# Altium PCB PCB1.PcbDoc (part 2 of 2)
Units mil, origin at the board's own origin, x right, y up, seen from the top; angles counter-clockwise.
Board outline 8460 x 6430 mil, 2 copper layers (Top Layer, Bottom Layer); 197 components, 213 nets, 804 pads, 61 vias.
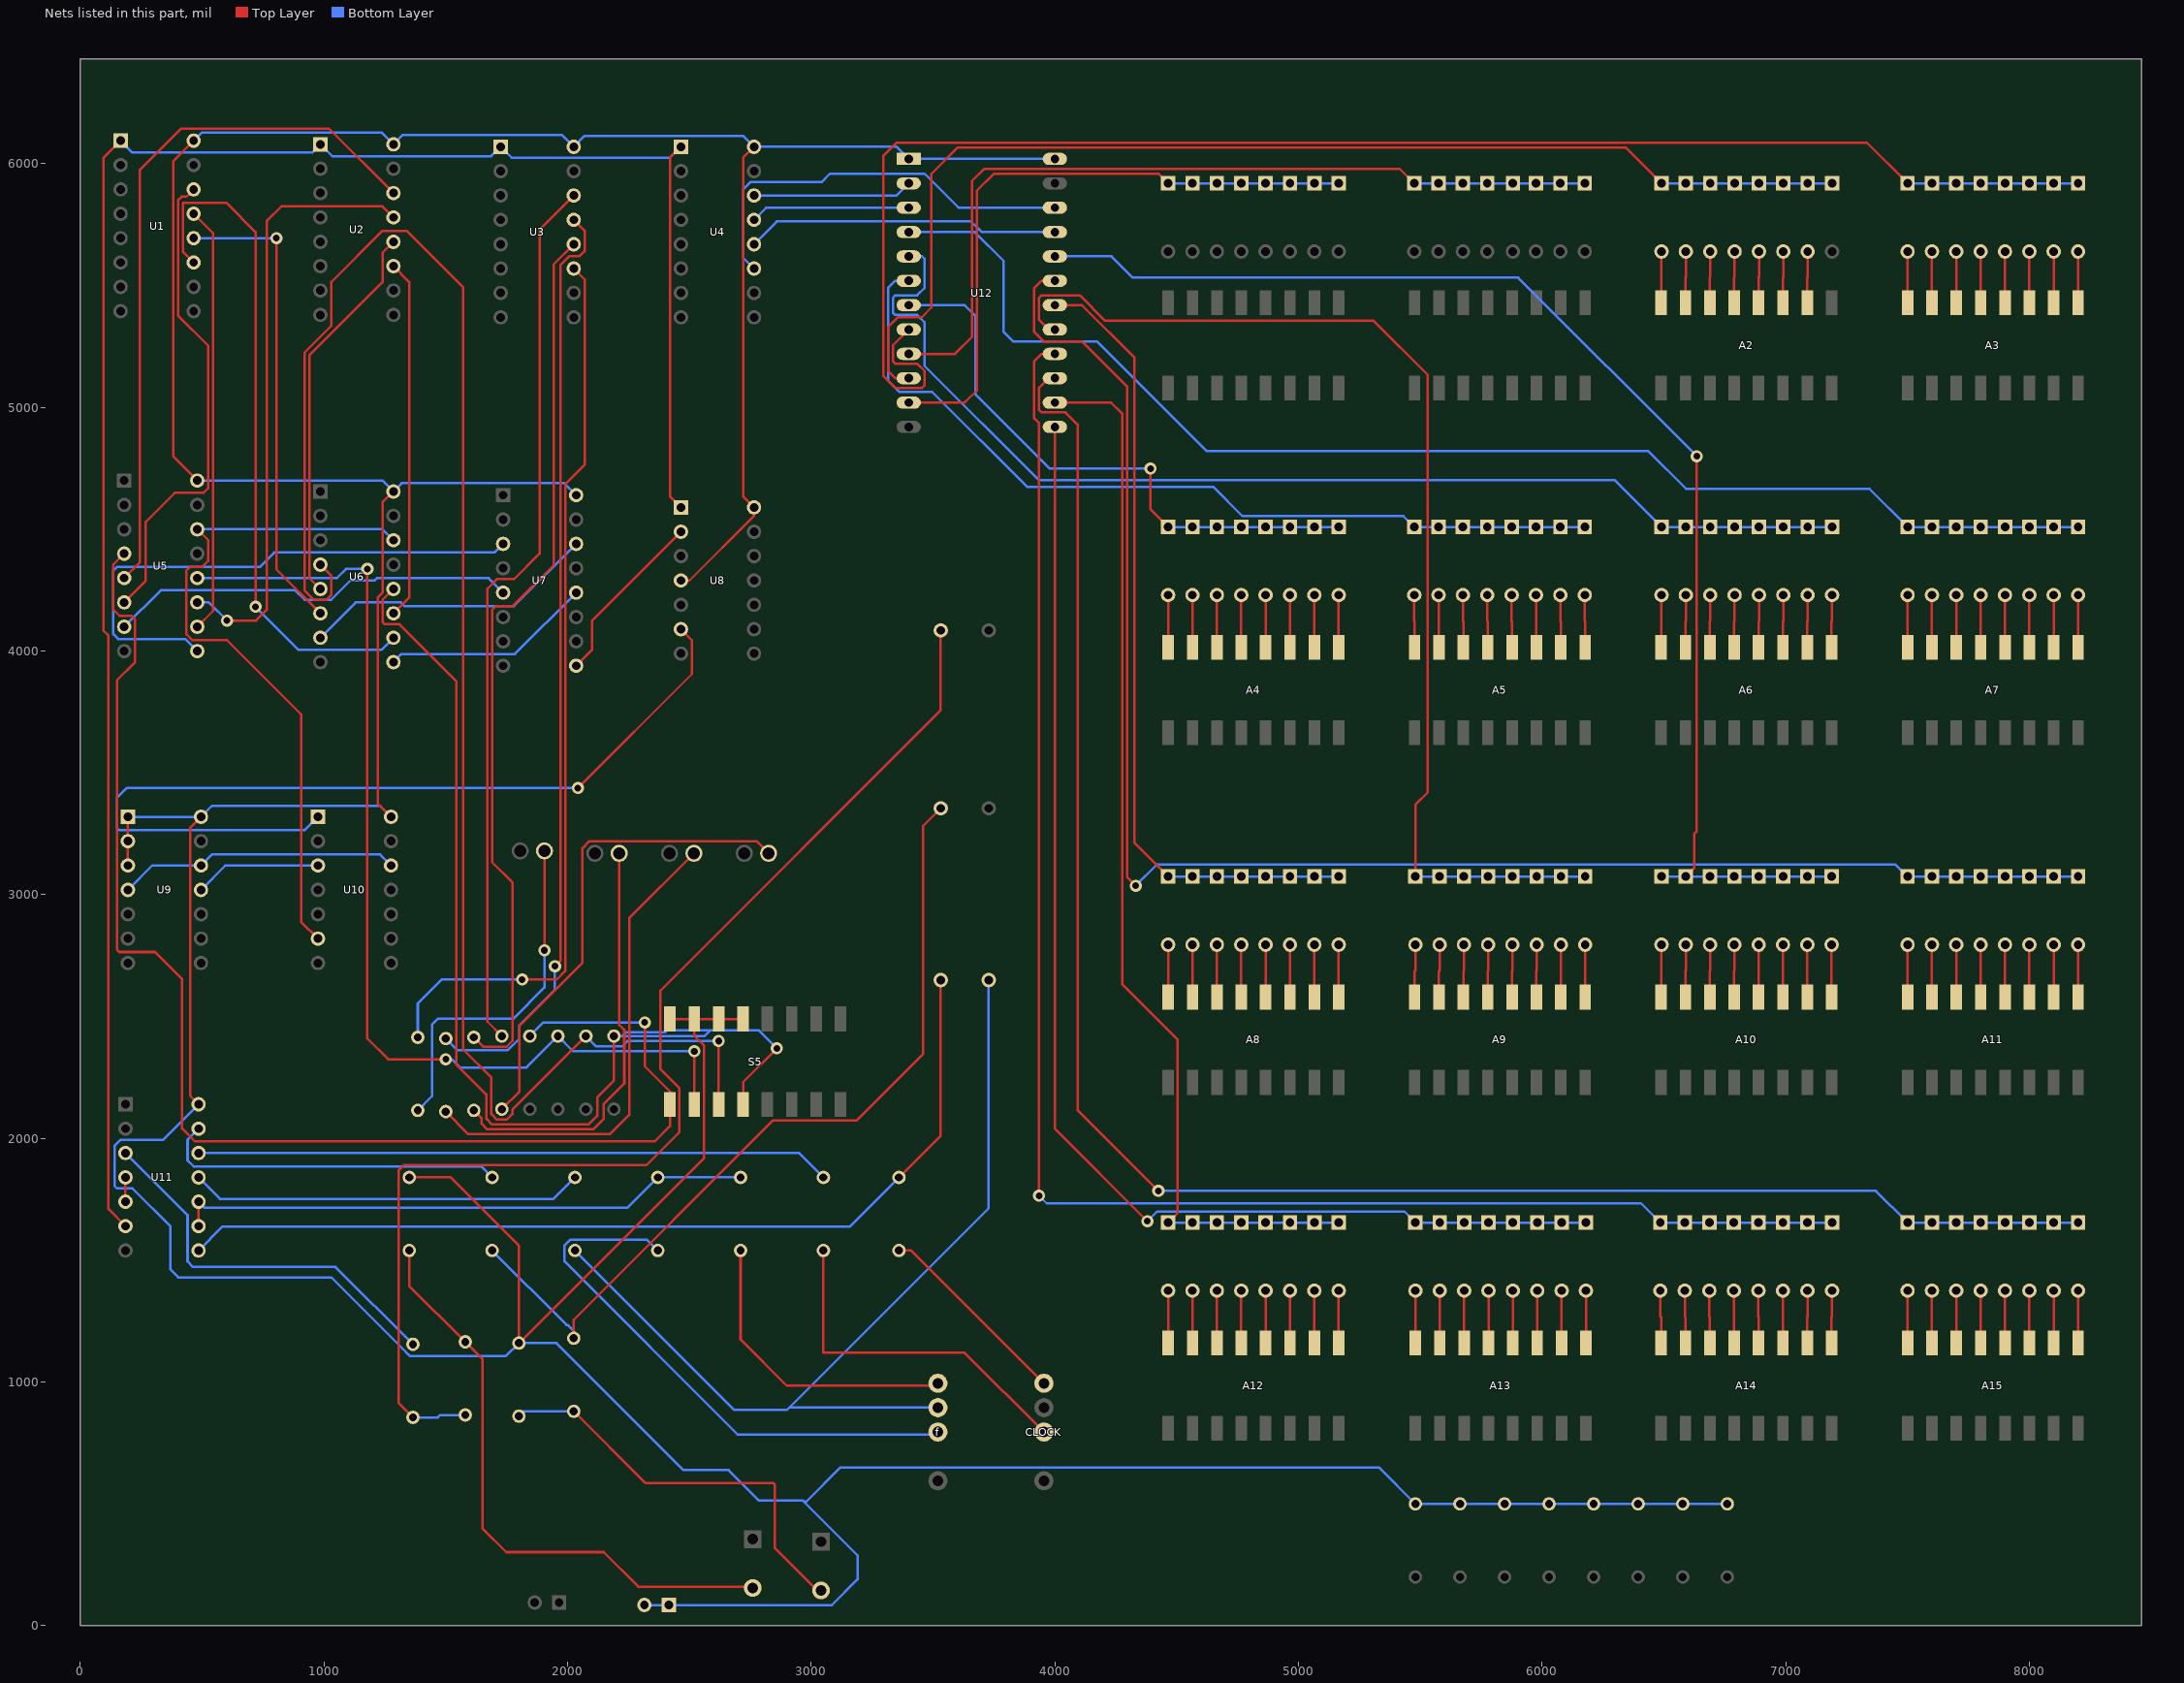
[diagram p2: the nets of this part, all layers, seen from the top]

## Via types
v1: diameter 50, hole 28, Top Layer to Bottom Layer, 61 vias

## Nets (pads, with @x,y where several pads share a name; then routed paths per layer and width w, separated by ;. In a path a pad name is that pad's centre, name@x,y a point inside that pad or via, vN(x,y) a via of type N, cw(c..) or ccw(c..) an arc to the next point about the centre after c; other vN are vias at no path point) (continued)
NetA2_10: A2.10 D18.1 | length 210.7
  Top Layer w10: A2.10@7088.33,5430.2 7088.33,5534 7090,5535.67 D18.1@7090,5640.24
NetA2_11: A2.11 D19.1 | length 210.7
  Top Layer w10: A2.11@6988.33,5430.2 6988.33,5534 6990,5535.67 D19.1@6990,5640.24
NetA2_12: A2.12 D20.1 | length 210.7
  Top Layer w10: A2.12@6888.33,5430.2 6888.33,5534 6890,5535.67 D20.1@6890,5640.24
NetA2_13: A2.13 D21.1 | length 210.7
  Top Layer w10: A2.13@6788.33,5430.2 6788.33,5534 6790,5535.67 D21.1@6790,5640.24
NetA2_14: A2.14 D22.1 | length 210.7
  Top Layer w10: A2.14@6688.33,5430.2 6688.33,5534 6690,5535.67 D22.1@6690,5640.24
NetA2_15: A2.15 D23.1 | length 210.7
  Top Layer w10: A2.15@6588.33,5430.2 6588.33,5534 6590,5535.67 D23.1@6590,5640.24
NetA2_16: A2.16 D24.1 | length 210.7
  Top Layer w10: A2.16@6488.33,5430.2 6488.33,5534 6490,5535.67 D24.1@6490,5640.24
NetA3_9: A3.9 D25.1 | length 210
  Top Layer w10: A3.9@8200,5430.2 D25.1@8200,5640.24
NetA3_10: A3.10 D26.1 | length 210
  Top Layer w10: A3.10@8100,5430.2 D26.1@8100,5640.24
NetA3_11: A3.11 D27.1 | length 210
  Top Layer w10: A3.11@8000,5430.2 D27.1@8000,5640.24
NetA3_12: A3.12 D28.1 | length 210
  Top Layer w10: A3.12@7900,5430.2 D28.1@7900,5640.24
NetA3_13: A3.13 D29.1 | length 210
  Top Layer w10: A3.13@7800,5430.2 D29.1@7800,5640.24
NetA3_14: A3.14 D30.1 | length 210
  Top Layer w10: A3.14@7700,5430.2 D30.1@7700,5640.24
NetA3_15: A3.15 D31.1 | length 210
  Top Layer w10: A3.15@7600,5430.2 D31.1@7600,5640.24
NetA3_16: A3.16 D32.1 | length 210
  Top Layer w10: A3.16@7500,5430.2 D32.1@7500,5640.24
NetA4_9: A4.9 D33.1 | length 214.8
  Top Layer w10: A4.9@5165,4015.39 D33.1@5165,4230.24
NetA4_10: A4.10 D34.1 | length 214.8
  Top Layer w10: A4.10@5065,4015.39 D34.1@5065,4230.24
NetA4_11: A4.11 D35.1 | length 214.8
  Top Layer w10: A4.11@4965,4015.39 D35.1@4965,4230.24
NetA4_12: A4.12 D36.1 | length 214.8
  Top Layer w10: A4.12@4865,4015.39 D36.1@4865,4230.24
NetA4_13: A4.13 D37.1 | length 214.8
  Top Layer w10: A4.13@4765,4015.39 D37.1@4765,4230.24
NetA4_14: A4.14 D38.1 | length 214.8
  Top Layer w10: A4.14@4665,4015.39 D38.1@4665,4230.24
NetA4_15: A4.15 D39.1 | length 214.8
  Top Layer w10: A4.15@4565,4015.39 D39.1@4565,4230.24
NetA4_16: A4.16 D40.1 | length 214.8
  Top Layer w10: A4.16@4465,4015.39 D40.1@4465,4230.24
NetA5_9: A5.9 D41.1 | length 215.7
  Top Layer w10: D41.1@6175,4230.24 6175,4122.67 6176.67,4121 A5.9@6176.67,4015.2
NetA5_10: A5.10 D42.1 | length 215.7
  Top Layer w10: D42.1@6075,4230.24 6075,4122.67 6076.67,4121 A5.10@6076.67,4015.2
NetA5_11: A5.11 D43.1 | length 215.7
  Top Layer w10: D43.1@5975,4230.24 5975,4122.67 5976.67,4121 A5.11@5976.67,4015.2
NetA5_12: A5.12 D44.1 | length 215.7
  Top Layer w10: D44.1@5875,4230.24 5875,4122.67 5876.67,4121 A5.12@5876.67,4015.2
NetA5_13: A5.13 D45.1 | length 215.7
  Top Layer w10: D45.1@5775,4230.24 5775,4122.67 5776.67,4121 A5.13@5776.67,4015.2
NetA5_14: A5.14 D46.1 | length 215.7
  Top Layer w10: D46.1@5675,4230.24 5675,4122.67 5676.67,4121 A5.14@5676.67,4015.2
NetA5_15: A5.15 D47.1 | length 215.7
  Top Layer w10: D47.1@5575,4230.24 5575,4122.67 5576.67,4121 A5.15@5576.67,4015.2
NetA5_16: A5.16 D48.1 | length 215.7
  Top Layer w10: D48.1@5475,4230.24 5475,4122.67 5476.67,4121 A5.16@5476.67,4015.2
NetA6_9: A6.9 D49.1 | length 215.7
  Top Layer w10: A6.9@7188.33,4015.2 7188.33,4121 7190,4122.67 D49.1@7190,4230.24
NetA6_10: A6.10 D50.1 | length 215.7
  Top Layer w10: A6.10@7088.33,4015.2 7088.33,4121 7090,4122.67 D50.1@7090,4230.24
NetA6_11: A6.11 D51.1 | length 215.7
  Top Layer w10: A6.11@6988.33,4015.2 6988.33,4121 6990,4122.67 D51.1@6990,4230.24
NetA6_12: A6.12 D52.1 | length 215.7
  Top Layer w10: A6.12@6888.33,4015.2 6888.33,4121 6890,4122.67 D52.1@6890,4230.24
NetA6_13: A6.13 D53.1 | length 215.7
  Top Layer w10: A6.13@6788.33,4015.2 6788.33,4121 6790,4122.67 D53.1@6790,4230.24
NetA6_14: A6.14 D54.1 | length 215.7
  Top Layer w10: A6.14@6688.33,4015.2 6688.33,4121 6690,4122.67 D54.1@6690,4230.24
NetA6_15: A6.15 D55.1 | length 215.7
  Top Layer w10: A6.15@6588.33,4015.2 6588.33,4121 6590,4122.67 D55.1@6590,4230.24
NetA6_16: A6.16 D56.1 | length 215.7
  Top Layer w10: A6.16@6488.33,4015.2 6488.33,4121 6490,4122.67 D56.1@6490,4230.24
NetA7_9: A7.9 D57.1 | length 215
  Top Layer w10: A7.9@8200,4015.2 D57.1@8200,4230.24
NetA7_10: A7.10 D58.1 | length 215
  Top Layer w10: A7.10@8100,4015.2 D58.1@8100,4230.24
NetA7_11: A7.11 D59.1 | length 215
  Top Layer w10: A7.11@8000,4015.2 D59.1@8000,4230.24
NetA7_12: A7.12 D60.1 | length 215
  Top Layer w10: A7.12@7900,4015.2 D60.1@7900,4230.24
NetA7_13: A7.13 D61.1 | length 215
  Top Layer w10: A7.13@7800,4015.2 D61.1@7800,4230.24
NetA7_14: A7.14 D62.1 | length 215
  Top Layer w10: A7.14@7700,4015.2 D62.1@7700,4230.24
NetA7_15: A7.15 D63.1 | length 215
  Top Layer w10: A7.15@7600,4015.2 D63.1@7600,4230.24
NetA7_16: A7.16 D64.1 | length 215
  Top Layer w10: A7.16@7500,4015.2 D64.1@7500,4230.24
NetA8_9: A8.9 D65.1 | length 214.8
  Top Layer w10: A8.9@5165,2580.39 D65.1@5165,2795.24
NetA8_10: A8.10 D66.1 | length 214.8
  Top Layer w10: A8.10@5065,2580.39 D66.1@5065,2795.24
NetA8_11: A8.11 D67.1 | length 214.8
  Top Layer w10: A8.11@4965,2580.39 D67.1@4965,2795.24
NetA8_12: A8.12 D68.1 | length 214.8
  Top Layer w10: A8.12@4865,2580.39 D68.1@4865,2795.24
NetA8_13: A8.13 D69.1 | length 214.8
  Top Layer w10: A8.13@4765,2580.39 D69.1@4765,2795.24
NetA8_14: A8.14 D70.1 | length 214.8
  Top Layer w10: A8.14@4665,2580.39 D70.1@4665,2795.24
NetA8_15: A8.15 D71.1 | length 214.8
  Top Layer w10: A8.15@4565,2580.39 D71.1@4565,2795.24
NetA8_16: A8.16 D72.1 | length 214.8
  Top Layer w10: A8.16@4465,2580.39 D72.1@4465,2795.24
NetA9_9: A9.9 D73.1 | length 214.8
  Top Layer w10: A9.9@6176.67,2580.39 D73.1@6176.67,2795.24
NetA9_10: A9.10 D74.1 | length 215
  Top Layer w10: A9.10@6076.67,2580.39 6076.67,2687 6077.14,2687.48 D74.1@6077.14,2795.24
NetA9_11: A9.11 D75.1 | length 215.2
  Top Layer w10: A9.11@5976.67,2580.39 5976.67,2687 5977.62,2687.95 D75.1@5977.62,2795.24
NetA9_12: A9.12 D76.1 | length 215.4
  Top Layer w10: A9.12@5876.67,2580.39 5876.67,2687 5878.1,2688.43 D76.1@5878.1,2795.24
NetA9_13: A9.13 D77.1 | length 215.6
  Top Layer w10: A9.13@5776.67,2580.39 5776.67,2686 5778.57,2687.91 D77.1@5778.57,2795.24
NetA9_14: A9.14 D78.1 | length 215.8
  Top Layer w10: A9.14@5676.67,2580.39 5676.67,2686 5679.05,2688.38 D78.1@5679.05,2795.24
NetA9_15: A9.15 D79.1 | length 216
  Top Layer w10: A9.15@5576.67,2580.39 5576.67,2686 5579.52,2688.86 D79.1@5579.52,2795.24
NetA9_16: A9.16 D80.1 | length 216.2
  Top Layer w10: A9.16@5476.67,2580.39 5476.67,2686 5480,2689.33 D80.1@5480,2795.24
NetA10_9: A10.9 D81.1 | length 214.8
  Top Layer w10: A10.9@7188.33,2580.39 7188.33,2687 D81.1@7188.33,2795.24
NetA10_10: A10.10 D82.1 | length 214.9
  Top Layer w10: A10.10@7088.33,2580.39 7088.33,2687 7088.57,2687.24 D82.1@7088.57,2795.24
NetA10_11: A10.11 D83.1 | length 215
  Top Layer w10: A10.11@6988.33,2580.39 6988.33,2687 6988.81,2687.48 D83.1@6988.81,2795.24
NetA10_12: A10.12 D84.1 | length 215.1
  Top Layer w10: A10.12@6888.33,2580.39 6888.33,2687 6889.05,2687.71 D84.1@6889.05,2795.24
NetA10_13: A10.13 D85.1 | length 215.2
  Top Layer w10: A10.13@6788.33,2580.39 6788.33,2687 6789.29,2687.95 D85.1@6789.29,2795.24
NetA10_14: A10.14 D86.1 | length 215.3
  Top Layer w10: A10.14@6688.33,2580.39 6688.33,2687 6689.52,2688.19 D86.1@6689.52,2795.24
NetA10_15: A10.15 D87.1 | length 215.4
  Top Layer w10: A10.15@6588.33,2580.39 6588.33,2687 6589.76,2688.43 D87.1@6589.76,2795.24
NetA10_16: A10.16 D88.1 | length 215.5
  Top Layer w10: A10.16@6488.33,2580.39 6488.33,2686 6490,2687.67 D88.1@6490,2795.24
NetA11_9: A11.9 D89.1 | length 214.8
  Top Layer w10: A11.9@8200,2580.39 D89.1@8200,2795.24
NetA11_10: A11.10 D90.1 | length 214.8
  Top Layer w10: A11.10@8100,2580.39 D90.1@8100,2795.24
NetA11_11: A11.11 D91.1 | length 214.8
  Top Layer w10: A11.11@8000,2580.39 D91.1@8000,2795.24
NetA11_12: A11.12 D92.1 | length 214.8
  Top Layer w10: A11.12@7900,2580.39 D92.1@7900,2795.24
NetA11_13: A11.13 D93.1 | length 214.8
  Top Layer w10: A11.13@7800,2580.39 D93.1@7800,2795.24
NetA11_14: A11.14 D94.1 | length 214.8
  Top Layer w10: A11.14@7700,2580.39 D94.1@7700,2795.24
NetA11_15: A11.15 D95.1 | length 214.8
  Top Layer w10: A11.15@7600,2580.39 D95.1@7600,2795.24
NetA11_16: A11.16 D96.1 | length 214.8
  Top Layer w10: A11.16@7500,2580.39 D96.1@7500,2795.24
NetA12_9: A12.9 D97.1 | length 215
  Top Layer w10: A12.9@5165,1160.2 D97.1@5165,1375.24
NetA12_10: A12.10 D98.1 | length 215
  Top Layer w10: A12.10@5065,1160.2 D98.1@5065,1375.24
NetA12_11: A12.11 D99.1 | length 215
  Top Layer w10: A12.11@4965,1160.2 D99.1@4965,1375.24
NetA12_12: A12.12 D100.1 | length 215
  Top Layer w10: A12.12@4865,1160.2 D100.1@4865,1375.24
NetA12_13: A12.13 D101.1 | length 215
  Top Layer w10: A12.13@4765,1160.2 D101.1@4765,1375.24
NetA12_14: A12.14 D102.1 | length 215
  Top Layer w10: A12.14@4665,1160.2 D102.1@4665,1375.24
NetA12_15: A12.15 D103.1 | length 215
  Top Layer w10: A12.15@4565,1160.2 D103.1@4565,1375.24
NetA12_16: A12.16 D104.1 | length 215
  Top Layer w10: A12.16@4465,1160.2 D104.1@4465,1375.24
NetA13_9: A13.9 D105.1 | length 215
  Top Layer w10: A13.9@6180,1160.2 D105.1@6180,1375.24
NetA13_10: A13.10 D106.1 | length 215
  Top Layer w10: A13.10@6080,1160.2 D106.1@6080,1375.24
NetA13_11: A13.11 D107.1 | length 215
  Top Layer w10: A13.11@5980,1160.2 D107.1@5980,1375.24
NetA13_12: A13.12 D108.1 | length 215
  Top Layer w10: A13.12@5880,1160.2 D108.1@5880,1375.24
NetA13_13: A13.13 D109.1 | length 215
  Top Layer w10: A13.13@5780,1160.2 D109.1@5780,1375.24
NetA13_14: A13.14 D110.1 | length 215
  Top Layer w10: A13.14@5680,1160.2 D110.1@5680,1375.24
NetA13_15: A13.15 D111.1 | length 215
  Top Layer w10: A13.15@5580,1160.2 D111.1@5580,1375.24
NetA13_16: A13.16 D112.1 | length 215
  Top Layer w10: A13.16@5480,1160.2 D112.1@5480,1375.24
NetA14_9: A14.9 D113.1 | length 215.7
  Top Layer w10: A14.9@7188.33,1160.2 7188.33,1266 7190,1267.67 D113.1@7190,1375.24
NetA14_10: A14.10 D114.1 | length 215.4
  Top Layer w10: A14.10@7088.33,1160.2 7088.33,1267 7089.29,1267.95 D114.1@7089.29,1375.24
NetA14_11: A14.11 D115.1 | length 215.1
  Top Layer w10: A14.11@6988.33,1160.2 6988.33,1267 6988.57,1267.24 D115.1@6988.57,1375.24
NetA14_12: A14.12 D116.1 | length 215.2
  Top Layer w10: D116.1@6887.86,1375.24 6887.86,1267.48 6888.33,1267 A14.12@6888.33,1160.2
NetA14_13: A14.13 D117.1 | length 215.5
  Top Layer w10: D117.1@6787.14,1375.24 6787.14,1268.19 6788.33,1267 A14.13@6788.33,1160.2
NetA14_14: A14.14 D118.1 | length 215.8
  Top Layer w10: D118.1@6686.43,1375.24 6686.43,1267.91 6688.33,1266 A14.14@6688.33,1160.2
NetA14_15: A14.15 D119.1 | length 216.1
  Top Layer w10: D119.1@6585.71,1375.24 6585.71,1268.62 6588.33,1266 A14.15@6588.33,1160.2
NetA14_16: A14.16 D120.1 | length 216.4
  Top Layer w10: D120.1@6485,1375.24 6485,1269.33 6488.33,1266 A14.16@6488.33,1160.2
NetA15_9: A15.9 D121.1 | length 215
  Top Layer w10: A15.9@8200,1160.2 D121.1@8200,1375.24
NetA15_10: A15.10 D122.1 | length 215
  Top Layer w10: A15.10@8100,1160.2 D122.1@8100,1375.24
NetA15_11: A15.11 D123.1 | length 215
  Top Layer w10: A15.11@8000,1160.2 D123.1@8000,1375.24
NetA15_12: A15.12 D124.1 | length 215
  Top Layer w10: A15.12@7900,1160.2 D124.1@7900,1375.24
NetA15_13: A15.13 D125.1 | length 215
  Top Layer w10: A15.13@7800,1160.2 D125.1@7800,1375.24
NetA15_14: A15.14 D126.1 | length 215
  Top Layer w10: A15.14@7700,1160.2 D126.1@7700,1375.24
NetA15_15: A15.15 D127.1 | length 215
  Top Layer w10: A15.15@7600,1160.2 D127.1@7600,1375.24
NetA15_16: A15.16 D128.1 | length 215
  Top Layer w10: A15.16@7500,1160.2 D128.1@7500,1375.24
NetC1_1: C1.1 R18.1 R19.2 | length 3502.2
  Top Layer w10: R18.1@2025,1180 2025,1256 2842,2073 3186,2073 3460,2347 3460,3283.43 C1.1@3531.57,3355
  Bottom Layer w10: R19.2@1690,1540 1995,1235 2000,1235 2025,1210 R18.1@2025,1180
NetC2_1: C2.1 R24.2 U11.8 | length 3880.3
  Top Layer w10: R24.2@3360,1840 3531.57,2011.57 C2.1@3531.57,2650
  Bottom Layer w10: U11.8@485,1540 582,1637 3157,1637 R24.2@3360,1840
NetC2_2: C2.2 f.2 R23.2 | length 3859.5
  Bottom Layer w10: R23.2@2030,1540 2685,885 2900,885 2910,895 ; f.2@3520,895 2910,895 ; C2.2@3728.43,2650 3728.43,1713.43 2910,895
NetC3_1: C3.1 R26.1 R27.2 | length 5042.7
  Top Layer w10: R27.2@1365,855 1307,913 1307,1870 1327,1890 2323,1890 2459,2026 2459,2206 2381,2284 2381,2607 3531.57,3757.57 C3.1@3531.57,4085
  Bottom Layer w10: R27.2@1365,855 1467,855 1477,865 R26.1@1580,865
NetD1_2: D1.2 D2.2 D3.2 D4.2 D5.2 D6.2 D7.2 D8.2 U12.11 | length 2651.4
  Top Layer w10: U12.11@3400,5020 3630,5020 3680,5070 3680,5890 3750,5960 4424.76,5960 D8.2@4465,5919.76
  Bottom Layer w10: D8.2@4465,5919.76 D7.2@4565,5919.76 D6.2@4665,5919.76 D5.2@4765,5919.76 D4.2@4865,5919.76 D3.2@4965,5919.76 D2.2@5065,5919.76 D1.2@5165,5919.76
NetD9_2: D9.2 D10.2 D11.2 D12.2 D13.2 D14.2 D15.2 D16.2 U12.9 | length 3489.7
  Top Layer w10: U12.9@3400,5220 3590,5220 3660,5290 3660,5930 3710,5980 5414.76,5980 D16.2@5475,5919.76
  Bottom Layer w10: D16.2@5475,5919.76 D15.2@5575,5919.76 D14.2@5675,5919.76 D13.2@5775,5919.76 D12.2@5880,5919.76 D11.2@5975,5919.76 D10.2@6075,5919.76 D9.2@6175,5919.76
NetD17_2: D17.2 D18.2 D19.2 D20.2 D21.2 D22.2 D23.2 D24.2 U12.10 | length 4840.3
  Top Layer w10: U12.10@3400,5120 3345,5120 3315,5150 3315,5330 3355,5370 3453,5370 3493,5410 3493,5959 3601,6067 6342.76,6067 D24.2@6490,5919.76
  Bottom Layer w10: D24.2@6490,5919.76 D23.2@6590,5919.76 D22.2@6690,5919.76 D21.2@6790,5919.76 D20.2@6890,5919.76 D19.2@6990,5919.76 D18.2@7090,5919.76 D17.2@7190,5919.76
NetD25_2: D25.2 D26.2 D27.2 D28.2 D29.2 D30.2 D31.2 D32.2 U12.8 | length 6457.4
  Top Layer w10: U12.8@3400,5320 3335,5255 3335,5190 3345,5180 3435,5180 3465,5150 3465,5090 3455,5080 3345,5080 3295,5130 3295,6032 3350,6087 7332.76,6087 D32.2@7500,5919.76
  Bottom Layer w10: D32.2@7500,5919.76 D31.2@7600,5919.76 D30.2@7700,5919.76 D29.2@7800,5919.76 D28.2@7900,5919.76 D27.2@8000,5919.76 D26.2@8100,5919.76 D25.2@8200,5919.76
NetD33_2: D33.2 D34.2 D35.2 D36.2 D37.2 D38.2 D39.2 D40.2 U12.7 | length 2428.6
  Top Layer w10: v1(4393,4749) 4393,4581.76 D40.2@4465,4509.76
  Bottom Layer w10: U12.7@3400,5420 3630,5420 3673,5377 3673,5055 3979,4749 v1(4393,4749) ; D40.2@4465,4509.76 D39.2@4565,4509.76 D38.2@4665,4509.76 D37.2@4765,4509.76 D36.2@4865,4509.76 D35.2@4965,4509.76 D34.2@5065,4509.76 D33.2@5165,4509.76
NetD41_2: D41.2 D42.2 D43.2 D44.2 D45.2 D46.2 D47.2 D48.2 U12.6 | length 3586.1
  Bottom Layer w10: U12.6@3400,5520 3345,5520 3315,5490 3315,5110 3362,5063 3497,5063 3887,4673 4651,4673 4769.4,4554.6 5430.17,4554.6 D48.2@5475,4509.76 D47.2@5575,4509.76 D46.2@5675,4509.76 D45.2@5775,4509.76 D44.2@5875,4509.76 D43.2@5975,4509.76 D42.2@6075,4509.76 D41.2@6175,4509.76
NetD49_2: D49.2 D50.2 D51.2 D52.2 D53.2 D54.2 D55.2 D56.2 U12.5 | length 4720.2
  Bottom Layer w10: U12.5@3400,5620 3455,5620 3465,5610 3465,5490 3435,5460 3345,5460 3335,5450 3335,5390 3345,5380 3435,5380 3465,5350 3465,5171 3934,4702 6297.76,4702 D56.2@6490,4509.76 D55.2@6590,4509.76 D54.2@6690,4509.76 D53.2@6790,4509.76 D52.2@6890,4509.76 D51.2@6990,4509.76 D50.2@7090,4509.76 D49.2@7190,4509.76
NetD57_2: D57.2 D58.2 D59.2 D60.2 D61.2 D62.2 D63.2 D64.2 U12.4 | length 5471.8
  Bottom Layer w10: U12.4@3400,5720 3671,5720 3790,5601 3790,5310 3830,5270 4174,5270 4622,4822 6435,4822 6591,4666 7343.76,4666 D64.2@7500,4509.76 D63.2@7600,4509.76 D62.2@7700,4509.76 D61.2@7800,4509.76 D60.2@7900,4509.76 D59.2@8000,4509.76 D58.2@8100,4509.76 D57.2@8200,4509.76
NetD65_2: D65.2 D66.2 D67.2 D68.2 D69.2 D70.2 D71.2 D72.2 U12.18 | length 3302.9
  Top Layer w10: U12.18@4000,5420 4111,5420 4327,5204 4327,3212.76 D72.2@4465,3074.76
  Bottom Layer w10: D72.2@4465,3074.76 D71.2@4565,3074.76 D70.2@4665,3074.76 D69.2@4765,3074.76 D68.2@4865,3074.76 D67.2@4965,3074.76 D66.2@5065,3074.76 D65.2@5165,3074.76
NetD73_2: D73.2 D74.2 D75.2 D76.2 D77.2 D78.2 D79.2 D80.2 U12.17 | length 4682.4
  Top Layer w10: U12.17@4000,5320 3975,5320 3935,5360 3935,5450 3945,5460 4102,5460 4206,5356 5308,5356 5530,5134 5530,3420 5480,3370 D80.2@5480,3074.76
  Bottom Layer w10: D80.2@5480,3074.76 D79.2@5579.52,3074.76 D78.2@5679.05,3074.76 D77.2@5778.57,3074.76 D76.2@5878.1,3074.76 D75.2@5977.62,3074.76 D74.2@6077.14,3074.76 D73.2@6176.67,3074.76
NetD81_2: D81.2 D82.2 D83.2 D84.2 D85.2 D86.2 D87.2 D88.2 U12.20 | length 5417
  Top Layer w10: D87.2@6589.76,3074.76 6624,3109 6624,3250 6635,3261 v1(6635,4800)
  Bottom Layer w10: U12.20@4000,5620 4232,5620 4319,5533 5902,5533 v1(6635,4800) ; D88.2@6490,3074.76 D87.2@6589.76,3074.76 D86.2@6689.52,3074.76 D85.2@6789.29,3074.76 D84.2@6889.05,3074.76 D83.2@6988.81,3074.76 D82.2@7088.57,3074.76 D81.2@7188.33,3074.76
NetD89_2: D89.2 D90.2 D91.2 D92.2 D93.2 D94.2 D95.2 D96.2 U12.19 | length 6740.4
  Top Layer w10: U12.19@4000,5520 3945,5520 3915,5490 3915,5310 3955,5270 4112,5270 4297,5085 4297,3072 v1(4332,3037)
  Bottom Layer w10: v1(4332,3037) 4420,3125 7449.76,3125 D96.2@7500,3074.76 D95.2@7600,3074.76 D94.2@7700,3074.76 D93.2@7800,3074.76 D92.2@7900,3074.76 D91.2@8000,3074.76 D90.2@8100,3074.76 D89.2@8200,3074.76
NetD97_2: D97.2 D98.2 D99.2 D100.2 D101.2 D102.2 D103.2 D104.2 U12.14 | length 4424.9
  Top Layer w10: U12.14@4000,5020 4230,5020 4277,4973 4277,2632 4504,2405 4504,1693.76 D104.2@4465,1654.76
  Bottom Layer w10: D104.2@4465,1654.76 D103.2@4565,1654.76 D102.2@4665,1654.76 D101.2@4765,1654.76 D100.2@4865,1654.76 D99.2@4965,1654.76 D98.2@5065,1654.76 D97.2@5165,1654.76
NetD105_2: D105.2 D106.2 D107.2 D108.2 D109.2 D110.2 D111.2 D112.2 U12.13 | length 5252.7
  Top Layer w10: U12.13@4000,4920 4000,2040 v1(4380,1660)
  Bottom Layer w10: v1(4380,1660) 4420,1700 5434.76,1700 D112.2@5480,1654.76 D111.2@5580,1654.76 D110.2@5680,1654.76 D109.2@5780,1654.76 D108.2@5880,1654.76 D107.2@5980,1654.76 D106.2@6080,1654.76 D105.2@6180,1654.76
NetD113_2: D113.2 D114.2 D115.2 D116.2 D117.2 D118.2 D119.2 D120.2 U12.16 | length 6831.4
  Top Layer w10: v1(3935,1765) 3935,4934.99 3915,4954.99 3915,5190 3945,5220 U12.16@4000,5220
  Bottom Layer w10: v1(3935,1765) 3966.44,1733.56 6406.21,1733.56 D120.2@6485,1654.76 D119.2@6585.71,1654.76 D118.2@6686.43,1654.76 D117.2@6787.14,1654.76 D116.2@6887.86,1654.76 D115.2@6988.57,1654.76 D114.2@7089.29,1654.76 D113.2@7190,1654.76
NetD121_2: D121.2 D122.2 D123.2 D124.2 D125.2 D126.2 D127.2 D128.2 U12.15 | length 7465.9
  Top Layer w10: U12.15@4000,5120 3975,5120 3935,5080 3935,4990 3945,4980 4043,4980 4093,4930 4093,2117 v1(4425,1785)
  Bottom Layer w10: v1(4425,1785) 7369.76,1785 D128.2@7500,1654.76 D127.2@7600,1654.76 D126.2@7700,1654.76 D125.2@7800,1654.76 D124.2@7900,1654.76 D123.2@8000,1654.76 D122.2@8100,1654.76 D121.2@8200,1654.76
NetD129_1: D129.1 R9.1 | length 2004.8
  Top Layer w10: R9.1@1730,2120 1802,2192 1802,2463 2061,2722 2061,3191 2090,3220 2775,3220 D129.1@2825,3170
NetD130_1: D130.1 R10.1 | length 2007.2
  Top Layer w10: R10.1@1500,2110 1592.56,2017.44 2173.44,2017.44 2252.56,2096.56 2252.56,2904.23 D130.1@2518.33,3170
NetD131_1: D131.1 R11.1 | length 1729.7
  Top Layer w10: R11.1@1615,2115 1647.44,2082.56 1647.44,2060 1670,2037.44 2105.44,2037.44 2147.44,2079.44 2147.44,2140 2232.56,2225.12 2232.56,2445.44 2211.67,2466.33 D131.1@2211.67,3170
NetD132_1: D132.1 R12.1 | length 1462
  Top Layer w10: v1(1905,2772) D132.1@1905,3180
  Bottom Layer w10: R12.1@1385,2115 1443,2173 1443,2467 1467,2491 1777,2491 1905,2619 v1(1905,2772)
NetR9_2: R9.2 U3.14 | length 3662.5
  Top Layer w10: R9.2@1730,2420 1670.47,2479.53 1670.47,4255.47 1710,4295 1780,4295 1885,4400 1885,5730 U3.14@2025,5870
NetR10_2: R10.2 U3.13 | length 3854.8
  Top Layer w10: v1(1948,2707) 1970,2729 1970,5584 2006,5620 2048,5620 2069.53,5641.53 2069.53,5725.47 U3.13@2025,5770
  Bottom Layer w10: R10.2@1500,2410 1547,2363 1755,2363 1802,2410 1802,2464 1948,2610 v1(1948,2707)
NetR11_2: R11.2 U3.12 | length 3666.7
  Top Layer w10: R11.2@1615,2415 1653,2377 1750,2377 1773,2400 1773,3051 1690.47,3133.53 1690.47,4170 1705.47,4185 1775,4185 1943,4353 1943,5588 U3.12@2025,5670
NetR12_2: R12.2 U3.11 | length 3733.5
  Top Layer w10: v1(1813,2652) 1955,2652 1990,2687 1990,4685 2069.53,4764.53 2069.53,5525.47 U3.11@2025,5570
  Bottom Layer w10: R12.2@1385,2415 1385,2554 1483,2652 v1(1813,2652)
NetR13_1: R13.1 S5.1 U5.4 | length 5685.2
  Top Layer w10: U5.4@180,4400 135.47,4355.47 135.47,4170 160.47,4145 210,4145 225,4130 225,3955 150,3880 150,2775 160,2765 306,2765 418,2653 418,2040 470,1988 2358,1988 2420,2050 S5.1@2420,2139.8 2420,2193 2317,2296 v1(2317,2476)
  Bottom Layer w10: R13.1@1845,2420 1901,2476 v1(2317,2476)
NetR14_1: R14.1 S5.2 U5.12 | length 4328.6
  Top Layer w10: v1(1178,4337) 1178,2410 1263,2325 v1(1500,2325) ; S5.2@2520,2139.8 v1(2520,2357.44)
  Bottom Layer w10: U5.12@480,4300 1053,4300 1090,4337 v1(1178,4337) ; v1(1500,2325) 1525,2325 1559,2291 1831,2291 R14.1@1960,2420 2022.56,2357.44 v1(2520,2357.44)
NetR15_1: R15.1 S5.3 U6.4 | length 7135
  Top Layer w10: U6.4@985,4355 1029.53,4310.47 1029.53,4230 1009.53,4210 960,4210 920,4250 920,5225 1030,5335 1030,5515 1240,5725 1339,5725 1572,5492 1572,2364 1687,2249 1687,2100.44 1710,2077.44 1750,2077.44 1773,2100.44 1773,2118 R15.1@2075,2420 ; S5.3@2620,2139.8 v1(2620,2400)
  Bottom Layer w10: R15.1@2075,2420 2117.56,2377.44 2223.44,2377.44 2246,2400 v1(2620,2400)
NetR16_1: R16.1 S5.4 U6.12 | length 4604.6
  Top Layer w10: U6.12@1285,4255 1240.47,4210.47 1240.47,4120 1250.47,4110 1310,4110 1543,3877 1543,2304 1666.1,2180.9 1666.1,2093.29 1667.44,2091.96 1667.44,2080 1690,2057.44 2085.44,2057.44 2122.6,2094.6 2122.6,2170 2190,2237.4 R16.1@2190,2420 ; S5.4@2720,2139.8 2720,2230.75 v1(2858.62,2369.38)
  Bottom Layer w10: R16.1@2190,2420 2224,2420 ; v1(2858.62,2369.38) 2785,2443 2585,2443 ; 2224,2420 2562,2420 2585,2443 ; 2224,2420 2240,2436 2400,2436 2407,2443 2585,2443
NetR17_1: Manual.2 R17.1 R18.2 | length 1690
  Top Layer w10: R18.2@2025,880 2320,585 2845,585 2850,580 2850,320 Manual.2@3025,145
  Bottom Layer w10: R17.1@1800,860 1820,880 R18.2@2025,880
NetR19_1: R19.1 U11.13 | length 1427.6
  Bottom Layer w10: U11.13@485,2040 440,1995 440,1910 465,1885 1645,1885 R19.1@1690,1840
NetR20_1: CLOCK.1 R20.1 | length 1459.6
  Top Layer w10: R20.1@3050,1540 3050,1120 3630,1120 CLOCK.1@3955,795
NetR20_2: R20.2 U11.12 | length 2606.4
  Bottom Layer w10: U11.12@485,1940 2950,1940 R20.2@3050,1840
NetR21_1: R21.1 R22.1 U11.9 U11.10 | length 2386.3
  Top Layer w10: U11.9@485,1640 U11.10@485,1740
  Bottom Layer w10: U11.10@485,1740 509,1716 2246,1716 R22.1@2370,1840 R21.1@2710,1840
NetR21_2: f.3 R21.2 | length 1257.8
  Top Layer w10: R21.2@2710,1540 2710,1175 2900,985 3510,985 f.3@3520,995
NetR22_2: f.1 R22.2 | length 2308
  Bottom Layer w10: R22.2@2370,1540 2326,1584 2010,1584 1987,1561 1987,1495 2697,785 3510,785 f.1@3520,795
NetR23_1: R23.1 U11.11 | length 1617.9
  Bottom Layer w10: U11.11@485,1840 573,1752 1942,1752 R23.1@2030,1840
NetR24_1: CLOCK.3 R24.1 | length 820.7
  Top Layer w10: R24.1@3360,1540 3410,1540 CLOCK.3@3955,995
NetR25_1: R25.1 R26.2 Reset.2 | length 2475.7
  Top Layer w10: R25.1@1350,1540 1350,1395 R26.2@1580,1165 1650,1095 1650,400 1748,302 2148,302 2290,160 2755,160 Reset.2@2760,155
NetR27_1: R27.1 U11.3 | length 1616.5
  Bottom Layer w10: U11.3@185,1940 440,1685 440,1495 462.5,1472.5 1047.5,1472.5 R27.1@1365,1155
NetU1_11: U1.11 U6.10 | length 2809.1
  Top Layer w10: U1.11@465,5595 420.47,5639.53 420.47,5839 421.47,5840 599,5840 719,5720 v1(719,4182)
  Bottom Layer w10: v1(719,4182) 896,4005 1235,4005 U6.10@1285,4055
NetU1_12: U1.12 U6.6 | length 1954.6
  Top Layer w10: v1(805,5695) 805,4335 U6.6@985,4155
  Bottom Layer w10: U1.12@465,5695 v1(805,5695)
NetU1_13: U1.13 U5.10 | length 1754.7
  Top Layer w10: U1.13@465,5795 544.53,5715.47 544.53,4164.53 U5.10@480,4100
NetU1_14: U1.14 U5.6 | length 1996.4
  Top Layer w10: U5.6@180,4200 268.81,4288.81 268.81,4530.81 388,4650 506,4650 524.53,4668.53 524.53,5253.47 400.47,5377.53 400.47,5850 415.47,5865 435,5865 U1.14@465,5895
NetU2_11: U2.11 U6.11 | length 1478.8
  Top Layer w10: U6.11@1285,4155 1350,4220 1350,5515 U2.11@1285,5580
NetU2_12: U2.12 U6.5 | length 1586.5
  Top Layer w10: U6.5@985,4255 940,4300 940,5214 1240,5514 1240,5635 U2.12@1285,5680
NetU2_13: U2.13 U5.11 | length 2493.8
  Top Layer w10: v1(602,4125) 721,4125 765,4169 765,5765 825,5825 1240,5825 U2.13@1285,5780
  Bottom Layer w10: U5.11@480,4200 527,4200 v1(602,4125)
NetU2_14: U2.14 U5.5 | length 2922.7
  Top Layer w10: U5.5@180,4300 245,4365 245,5976 414,6145 1020,6145 U2.14@1285,5880
NetU5_7: U5.7 U7.5 | length 1695.1
  Bottom Layer w10: U5.7@180,4100 330,4250 880.94,4250 920.47,4210.47 1029.53,4210.47 1109.53,4290.47 1208.75,4290.47 1217.8,4299.53 1675.47,4299.53 U7.5@1735,4240
NetU5_9: U5.9 U7.3 | length 2279.6
  Bottom Layer w10: U5.9@480,4000 430,4050 155,4050 135,4070 135,4330 150,4345 736,4345 796,4405 1700,4405 U7.3@1735,4440
NetU5_14: U5.14 U6.14 U10.6 | length 2895
  Top Layer w10: U5.14@480,4500 524.53,4455.47 524.53,4370 499.53,4345 450,4345 435,4330 435,4070 460,4045 602,4045 906,3741 906,2889 U10.6@975,2820
  Bottom Layer w10: U5.14@480,4500 1240,4500 U6.14@1285,4455
NetU6_7: U6.7 U7.14 | length 1221.5
  Bottom Layer w10: U6.7@985,4055 1129.53,4199.53 1315.47,4199.53 1330,4185 1780,4185 U7.14@2035,4440
NetU6_9: U6.9 U7.12 | length 868.1
  Bottom Layer w10: U6.9@1285,3955 1318,3988 1783,3988 U7.12@2035,4240
NetU7_9: U7.9 U8.2 | length 728.1
  Top Layer w10: U7.9@2035,3940 2099.53,4004.53 2099.53,4124.53 U8.2@2465,4490
NetU8_6: U8.6 U10.1 | length 3748
  Top Layer w10: v1(2042,3438) 2510,3906 2510,4045 U8.6@2465,4090
  Bottom Layer w10: U10.1@975,3320 920,3265 160,3265 150,3275 150,3398 190,3438 v1(2042,3438)
NetU9_4: U9.4 U9.12 U10.12 | length 1158.7
  Bottom Layer w10: U9.4@195,3020 295,3120 U9.12@495,3120 540,3165 1230,3165 U10.12@1275,3120
NetU9_11: U9.11 U10.3 | length 521.4
  Bottom Layer w10: U9.11@495,3020 595,3120 U10.3@975,3120
NetU11_4: U11.4 U11.5 | length 100
  Top Layer w10: U11.5@185,1740 U11.4@185,1840
PC_0: U4.14 U12.2 | length 655.7
  Bottom Layer w10: U4.14@2765,5870 3350,5870 U12.2@3400,5920
PC_1: U4.13 U12.3 | length 655.7
  Bottom Layer w10: U4.13@2765,5770 2815,5820 U12.3@3400,5820
PC_2: U4.12 U12.21 | length 1292.2
  Bottom Layer w10: U4.12@2765,5670 2859,5764 3656,5764 3700,5720 U12.21@4000,5720
PC_3: U4.11 U12.22 | length 1708.6
  Bottom Layer w10: U4.11@2765,5570 2720,5615 2720,5895 2750,5925 3042,5925 3077,5960 3465,5960 3605,5820 U12.22@4000,5820
RESET: U1.1 U2.1 U3.1 U4.1 U8.1 U11.6 | length 8446.3
  Top Layer w10: U1.1@165,6095 95.47,6025.47 95.47,4083.14 115,4063.61 115,1710 U11.6@185,1640 ; U8.1@2465,4590 2420,4635 2420,6025 U4.1@2465,6070
  Bottom Layer w10: U1.1@165,6095 214,6046 951,6046 U2.1@985,6080 1034,6031 1686,6031 U3.1@1725,6070 1770,6025 2420,6025 U4.1@2465,6070
VCC: P1.1 P1.2 R1.2 R2.2 R3.2 R4.2 R5.2 R6.2 R7.2 R8.2 R17.2 R25.2 S5.13 S5.14 S5.15 S5.16 U1.16 U2.16 U3.16 U4.16 U5.16 U6.16 U7.16 U8.4 U8.14 U9.1 U9.2 U9.3 U9.14 U10.14 U11.14 U12.1 U12.24 | length 24883.5
  Top Layer w10: U9.3@195,3120 U9.2@195,3220 U9.1@195,3320 ; U1.16@465,6095 380.47,6010.47 380.47,4799.53 U5.16@480,4700 ; U11.14@485,2140 450,2175 450,3275 U9.14@495,3320 ; U10.14@1275,3320 1220.47,3374.53 1220.47,4219.53 1240.47,4239.53 1240.47,4610.47 U6.16@1285,4655 ; R25.2@1350,1840 1520,1840 1800,1560 R17.2@1800,1160 2560,1920 2560,2381 2520,2421 S5.15@2520,2490.2 ; S5.16@2420,2490.2 S5.15@2520,2490.2 ; U8.4@2465,4290 2500,4290 2765,4555 U8.14@2765,4590 2720,4635 2720,6025 U4.16@2765,6070 ; S5.13@2720,2490.2 S5.14@2620,2490.2 S5.15@2520,2490.2
  Bottom Layer w10: U9.1@195,3320 U9.14@495,3320 540,3365 1230,3365 U10.14@1275,3320 ; U1.16@465,6095 499,6129 1236,6129 U2.16@1285,6080 1324,6119 1976,6119 U3.16@2025,6070 2070,6115 2720,6115 U4.16@2765,6070 3350,6070 U12.1@3400,6020 U12.24@4000,6020 ; U5.16@480,4700 1240,4700 U6.16@1285,4655 1319,4689 1986,4689 U7.16@2035,4640 ; U11.14@485,2140 340,1995 165,1995 140,1970 140,1805 150,1795 214,1795 370,1639 370,1462 402,1430 1030,1430 1322.44,1137.56 1322.44,1137.37 1347.37,1112.44 1347.56,1112.44 1353,1107 1747,1107 R17.2@1800,1160 1954,1160 2474,640 2661,640 2660,639 2785.68,513.32 2965.73,513.32 2969.05,510 ; P1.2@2315,85 P1.1@2415,85 3085,85 3190,190 3190,289.05 2969.05,510 ; R1.2@6760,500 R2.2@6577.14,500 R3.2@6394.29,500 R4.2@6211.43,500 R5.2@6028.57,500 R6.2@5845.71,500 R7.2@5662.86,500 R8.2@5480,500 5330.63,649.37 3119.37,649.37 2980,510 2969.05,510
pads on no net: CLOCK.M f.M S5.5 S5.6 S5.7 S5.8 S5.9 S5.10 S5.11 S5.12 U1.15 U2.15 U3.15 U4.15 U7.7 U8.5 U8.8 U8.9 U8.10 U8.11 U8.12 U8.13 U11.1 U11.2

## Polygon pours and split planes (outlines as drawn)
GND on Top Layer "Top Layer-GND" (solid, pour order 22): -5,6440 0,6435 0,0 8460,0 8460,6430
no net on Top Layer "Top Layer-No Net 1" (solid, pour order 18): -5,6440
no net on Top Layer "Top Layer-No Net" (solid, pour order 0): 0,6430
GND on Bottom Layer "Bottom Layer-GND" (solid, pour order 24): 0,6430 0,0 8460,0 8460,6430
no net on Bottom Layer "Bottom Layer-No Net" (solid, pour order 10): 8780,6365

## Keep-outs
Keep-Out Layer:
  the board outline again, w10

## Silkscreen, mask and mechanical layers (free items; w line width, h text height)
Top Overlay:
  drawing of 13155 lines, arcs and shapes, not listed
  text "Rom Control" at 3265,6230 h60
  text "A Reg" at 190,6195 h60
  text "B Reg" at 995,6185 h60
  text "Out Reg" at 1675,6180 h60
  text "PC Reg" at 2450,6165 h60
  text "Reg" at 1395,5800 h60
  text "Data" at 615,4390 h60
  text "ALU" at 2180,4360 h60
  text "Sel" at 655,4260 h60
  text "Carry" at 2115,4250 h60
  text "Decoder" at 570,3035 h50
  text "4bit data  processor" at 70,1340 h60
  text "Hongru Li" at 75,1225 h60
  text "Yue Li" at 75,1110 h60
  text "Runzhuo Yang" at 75,990 h60
  text "Shicai Wang" at 70,865 h60
  text "Zhenfang He" at 70,750 h60
  text "GND" at 1840,400 h60
  text "VCC" at 2290,395 h60
Mechanical 1:
  the board outline again, w10

## Text inside footprints (layer, text, board x,y; h text height)
A0: Top Overlay "8" at 5116.54,5056.89 h31.5; Top Overlay "7" at 5016.54,5056.89 h31.5; Top Overlay "ON" at 4345,5399.8 h39.37; Top Overlay "1" at 4421.06,5056.89 h31.5; Top Overlay "2" at 4512.6,5056.89 h31.5; Top Overlay "3" at 4611.02,5056.89 h31.5; Top Overlay "4" at 4714.37,5056.89 h31.5; Top Overlay "5" at 4813.78,5056.89 h31.5; Top Overlay "6" at 4916.14,5056.89 h31.5
A1: Top Overlay "6" at 5927.81,5056.89 h31.5; Top Overlay "5" at 5825.45,5056.89 h31.5; Top Overlay "4" at 5726.04,5056.89 h31.5; Top Overlay "3" at 5622.69,5056.89 h31.5; Top Overlay "2" at 5524.26,5056.89 h31.5; Top Overlay "1" at 5432.73,5056.89 h31.5; Top Overlay "ON" at 5356.67,5399.8 h39.37; Top Overlay "7" at 6028.2,5056.89 h31.5; Top Overlay "8" at 6128.2,5056.89 h31.5
A2: Top Overlay "6" at 6939.47,5056.89 h31.5; Top Overlay "5" at 6837.11,5056.89 h31.5; Top Overlay "4" at 6737.7,5056.89 h31.5; Top Overlay "3" at 6634.36,5056.89 h31.5; Top Overlay "2" at 6535.93,5056.89 h31.5; Top Overlay "1" at 6444.4,5056.89 h31.5; Top Overlay "ON" at 6368.33,5399.8 h39.37; Top Overlay "7" at 7039.87,5056.89 h31.5; Top Overlay "8" at 7139.87,5056.89 h31.5
A3: Top Overlay "6" at 7951.14,5056.89 h31.5; Top Overlay "5" at 7848.78,5056.89 h31.5; Top Overlay "4" at 7749.37,5056.89 h31.5; Top Overlay "3" at 7646.02,5056.89 h31.5; Top Overlay "2" at 7547.6,5056.89 h31.5; Top Overlay "1" at 7456.06,5056.89 h31.5; Top Overlay "ON" at 7380,5399.8 h39.37; Top Overlay "7" at 8051.54,5056.89 h31.5; Top Overlay "8" at 8151.54,5056.89 h31.5
A4: Top Overlay "6" at 4916.14,3642.09 h31.5; Top Overlay "5" at 4813.78,3642.09 h31.5; Top Overlay "4" at 4714.37,3642.09 h31.5; Top Overlay "3" at 4611.02,3642.09 h31.5; Top Overlay "2" at 4512.6,3642.09 h31.5; Top Overlay "1" at 4421.06,3642.09 h31.5; Top Overlay "ON" at 4345,3985 h39.37; Top Overlay "7" at 5016.54,3642.09 h31.5; Top Overlay "8" at 5116.54,3642.09 h31.5
A5: Top Overlay "6" at 5927.81,3641.89 h31.5; Top Overlay "5" at 5825.45,3641.89 h31.5; Top Overlay "4" at 5726.04,3641.89 h31.5; Top Overlay "3" at 5622.69,3641.89 h31.5; Top Overlay "2" at 5524.26,3641.89 h31.5; Top Overlay "1" at 5432.73,3641.89 h31.5; Top Overlay "ON" at 5356.67,3984.8 h39.37; Top Overlay "7" at 6028.2,3641.89 h31.5; Top Overlay "8" at 6128.2,3641.89 h31.5
A6: Top Overlay "6" at 6939.47,3641.89 h31.5; Top Overlay "5" at 6837.11,3641.89 h31.5; Top Overlay "4" at 6737.7,3641.89 h31.5; Top Overlay "3" at 6634.36,3641.89 h31.5; Top Overlay "2" at 6535.93,3641.89 h31.5; Top Overlay "1" at 6444.4,3641.89 h31.5; Top Overlay "ON" at 6368.33,3984.8 h39.37; Top Overlay "7" at 7039.87,3641.89 h31.5; Top Overlay "8" at 7139.87,3641.89 h31.5
A7: Top Overlay "6" at 7951.14,3641.89 h31.5; Top Overlay "5" at 7848.78,3641.89 h31.5; Top Overlay "4" at 7749.37,3641.89 h31.5; Top Overlay "3" at 7646.02,3641.89 h31.5; Top Overlay "2" at 7547.6,3641.89 h31.5; Top Overlay "1" at 7456.06,3641.89 h31.5; Top Overlay "ON" at 7380,3984.8 h39.37; Top Overlay "7" at 8051.54,3641.89 h31.5; Top Overlay "8" at 8151.54,3641.89 h31.5
A8: Top Overlay "6" at 4916.14,2207.09 h31.5; Top Overlay "5" at 4813.78,2207.09 h31.5; Top Overlay "4" at 4714.37,2207.09 h31.5; Top Overlay "3" at 4611.02,2207.09 h31.5; Top Overlay "2" at 4512.6,2207.09 h31.5; Top Overlay "1" at 4421.06,2207.09 h31.5; Top Overlay "ON" at 4345,2550 h39.37; Top Overlay "7" at 5016.54,2207.09 h31.5; Top Overlay "8" at 5116.54,2207.09 h31.5
A9: Top Overlay "6" at 5927.81,2207.09 h31.5; Top Overlay "5" at 5825.45,2207.09 h31.5; Top Overlay "4" at 5726.04,2207.09 h31.5; Top Overlay "3" at 5622.69,2207.09 h31.5; Top Overlay "2" at 5524.26,2207.09 h31.5; Top Overlay "1" at 5432.73,2207.09 h31.5; Top Overlay "ON" at 5356.67,2550 h39.37; Top Overlay "7" at 6028.2,2207.09 h31.5; Top Overlay "8" at 6128.2,2207.09 h31.5
A10: Top Overlay "6" at 6939.47,2207.09 h31.5; Top Overlay "5" at 6837.11,2207.09 h31.5; Top Overlay "4" at 6737.7,2207.09 h31.5; Top Overlay "3" at 6634.36,2207.09 h31.5; Top Overlay "2" at 6535.93,2207.09 h31.5; Top Overlay "1" at 6444.4,2207.09 h31.5; Top Overlay "ON" at 6368.33,2550 h39.37; Top Overlay "7" at 7039.87,2207.09 h31.5; Top Overlay "8" at 7139.87,2207.09 h31.5
A11: Top Overlay "6" at 7951.14,2207.09 h31.5; Top Overlay "5" at 7848.78,2207.09 h31.5; Top Overlay "4" at 7749.37,2207.09 h31.5; Top Overlay "3" at 7646.02,2207.09 h31.5; Top Overlay "2" at 7547.6,2207.09 h31.5; Top Overlay "1" at 7456.06,2207.09 h31.5; Top Overlay "ON" at 7380,2550 h39.37; Top Overlay "7" at 8051.54,2207.09 h31.5; Top Overlay "8" at 8151.54,2207.09 h31.5
A12: Top Overlay "6" at 4916.14,786.89 h31.5; Top Overlay "5" at 4813.78,786.89 h31.5; Top Overlay "4" at 4714.37,786.89 h31.5; Top Overlay "3" at 4611.02,786.89 h31.5; Top Overlay "2" at 4512.6,786.89 h31.5; Top Overlay "1" at 4421.06,786.89 h31.5; Top Overlay "ON" at 4345,1129.8 h39.37; Top Overlay "7" at 5016.54,786.89 h31.5; Top Overlay "8" at 5116.54,786.89 h31.5
A13: Top Overlay "6" at 5931.14,786.89 h31.5; Top Overlay "5" at 5828.78,786.89 h31.5; Top Overlay "4" at 5729.37,786.89 h31.5; Top Overlay "3" at 5626.02,786.89 h31.5; Top Overlay "2" at 5527.6,786.89 h31.5; Top Overlay "1" at 5436.06,786.89 h31.5; Top Overlay "ON" at 5360,1129.8 h39.37; Top Overlay "7" at 6031.54,786.89 h31.5; Top Overlay "8" at 6131.54,786.89 h31.5
A14: Top Overlay "6" at 6939.47,786.89 h31.5; Top Overlay "5" at 6837.11,786.89 h31.5; Top Overlay "4" at 6737.7,786.89 h31.5; Top Overlay "3" at 6634.36,786.89 h31.5; Top Overlay "2" at 6535.93,786.89 h31.5; Top Overlay "1" at 6444.4,786.89 h31.5; Top Overlay "ON" at 6368.33,1129.8 h39.37; Top Overlay "7" at 7039.87,786.89 h31.5; Top Overlay "8" at 7139.87,786.89 h31.5
A15: Top Overlay "6" at 7951.14,786.89 h31.5; Top Overlay "5" at 7848.78,786.89 h31.5; Top Overlay "4" at 7749.37,786.89 h31.5; Top Overlay "3" at 7646.02,786.89 h31.5; Top Overlay "2" at 7547.6,786.89 h31.5; Top Overlay "1" at 7456.06,786.89 h31.5; Top Overlay "ON" at 7380,1129.8 h39.37; Top Overlay "7" at 8051.54,786.89 h31.5; Top Overlay "8" at 8151.54,786.89 h31.5
S5: Top Overlay "6" at 2871.14,2116.89 h31.5; Top Overlay "5" at 2768.78,2116.89 h31.5; Top Overlay "4" at 2669.37,2116.89 h31.5; Top Overlay "3" at 2566.02,2116.89 h31.5; Top Overlay "2" at 2467.6,2116.89 h31.5; Top Overlay "1" at 2376.06,2116.89 h31.5; Top Overlay "ON" at 2300,2459.8 h39.37; Top Overlay "7" at 2971.54,2116.89 h31.5; Top Overlay "8" at 3071.54,2116.89 h31.5